# EAGLE board Untitled (EAGLE 7.1.0)
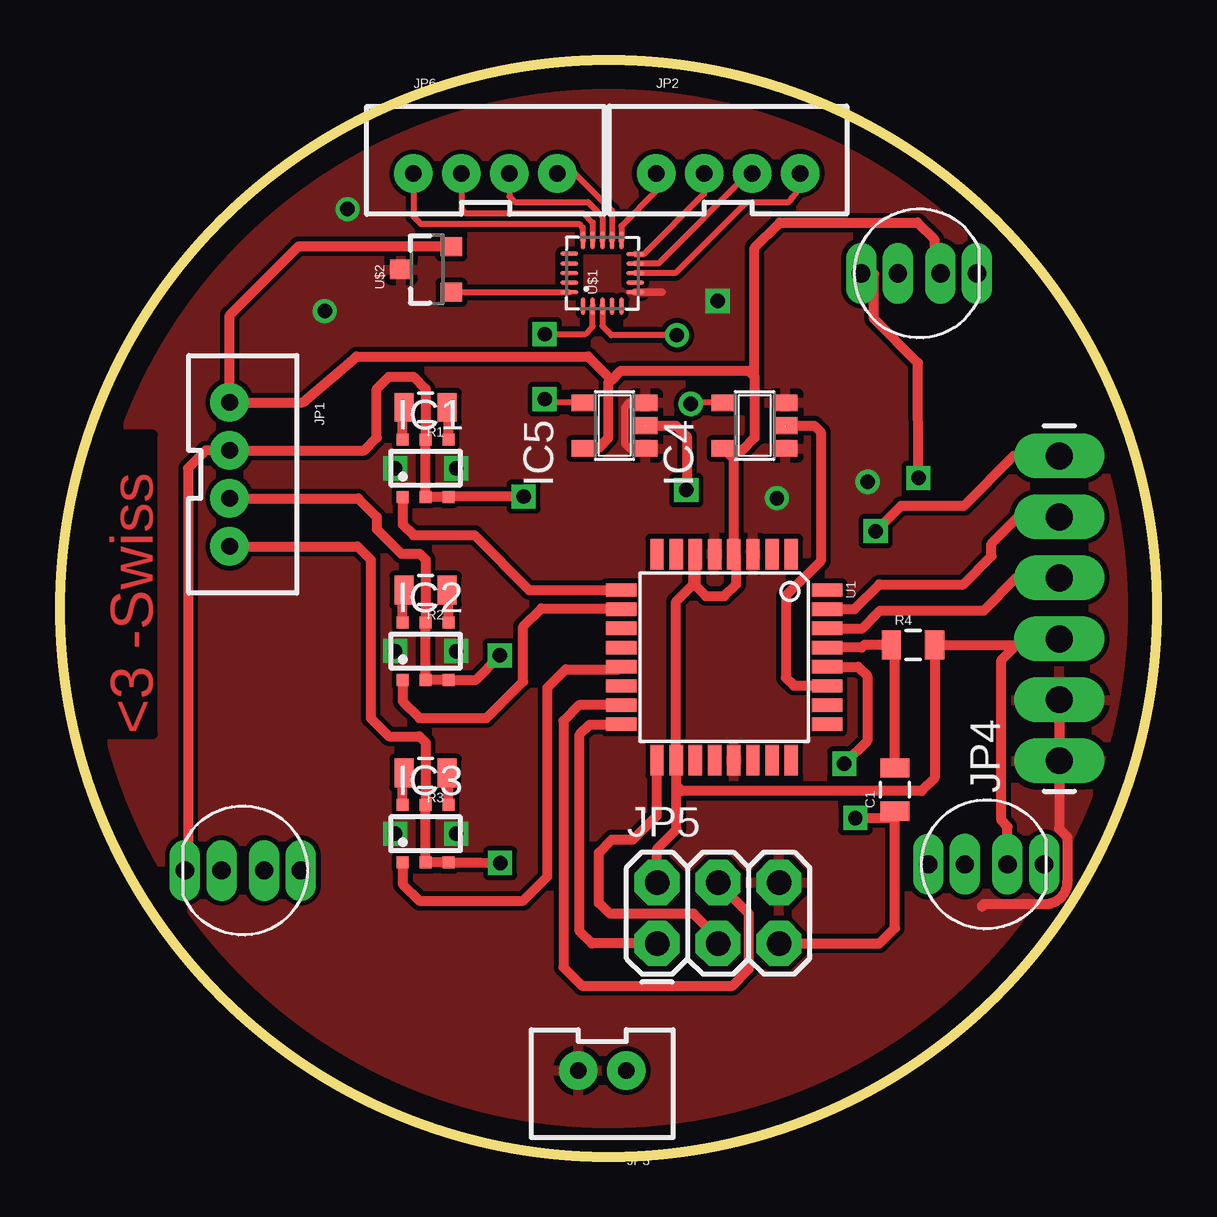
[diagram p0: board, top side]
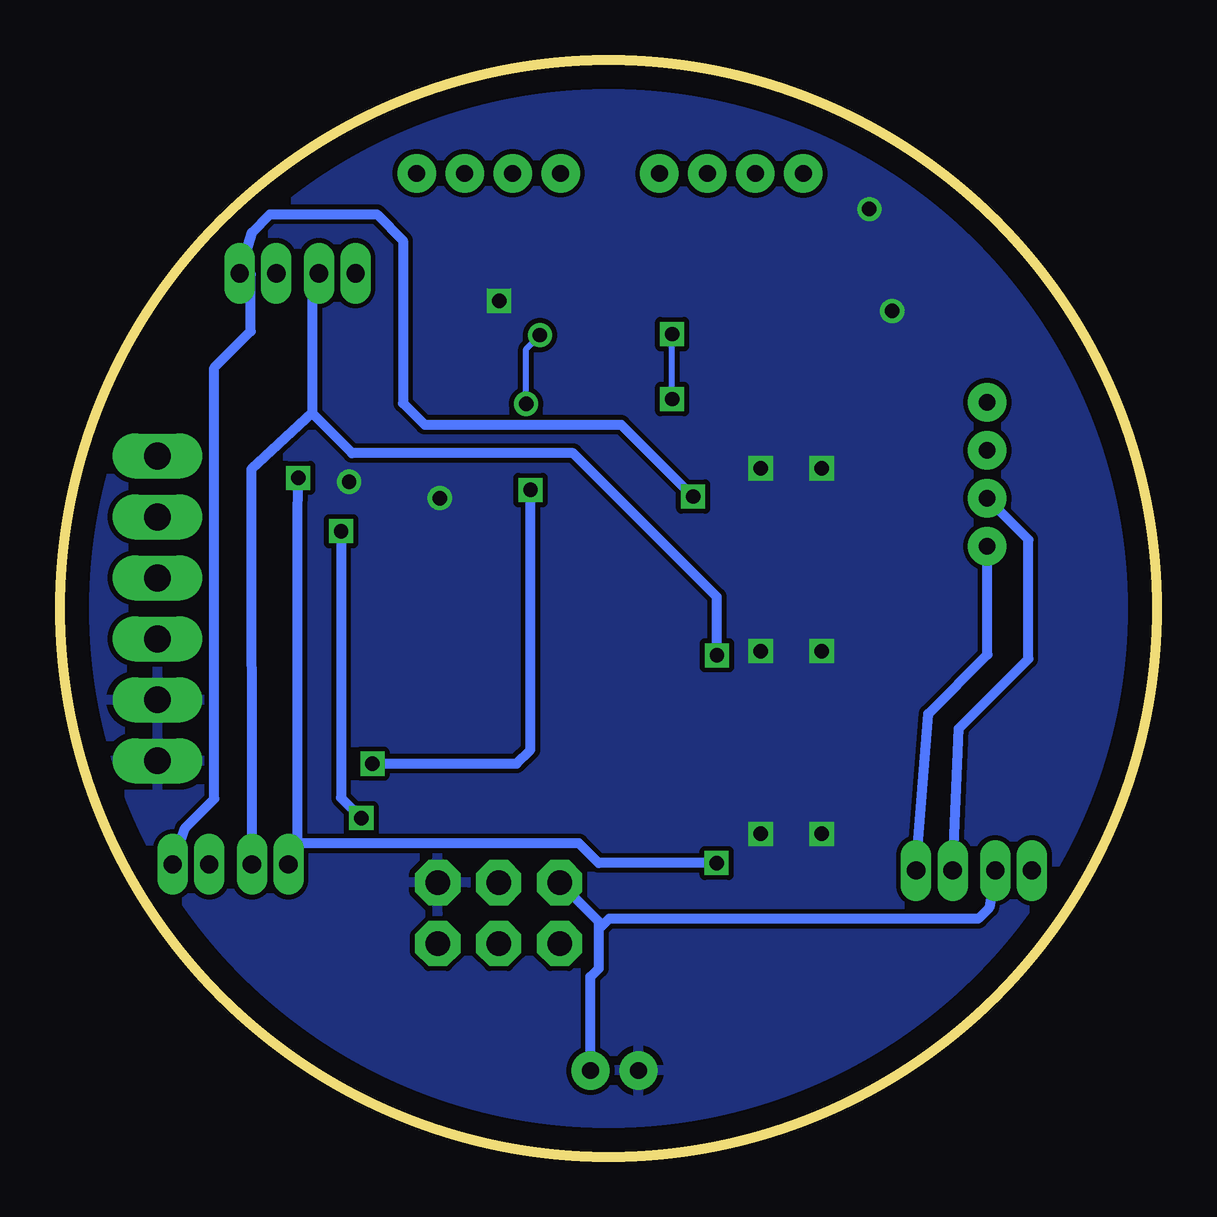
[diagram p1: board, bottom side, seen from below]

Size 45.72 x 45.72 mm. Coordinates in mm from the lower left corner, seen from the top.
Outline: circle at 22.86,22.86 radius 22.86
Copper layers (1*16): Top 0.035mm / dielectric 1.5mm / Bottom 0.035mm
Design rules "default": minimum track width 10mil, minimum drill 24mil, track to track 8mil, track to pad 8mil, pad to pad 8mil, via to via 8mil, smd to smd 8mil, copper to edge 40mil, drill to drill 8mil, minimum pad ring 10mil, minimum via ring 8mil, stop-mask expansion 4mil, vias tented up to drill 0mil, thermal gap 10mil

## Footprints (pad centres in the part's own frame; a part is rotated, then mirrored left to right if it is on the bottom)
0805 = smd 0.8 x 1.2: 1 -0.9,0; 2 0.9,0
LED-RGB-THRU = drill 0.762 pad 0.889 long: 1 2.413,0; 2 0.889,0; 3 -0.889,0; 4 -2.413,0
SC74_INFINEON = smd 0.5 x 0.5: 1 -0.95,-1.2; 2 0,-1.2; 3 0.95,-1.2; 4 0.95,1.2; 5 0,1.2; 6 -0.95,1.2
SOT23-5 = smd 0.69 x 0.99: 1 -0.95,-1.29; 2 0,-1.29; 3 0.95,-1.29; 4 0.95,1.3; 5 -0.95,1.3
JST-4-PTH-VERT = drill 0.7 pad 1.6: 1 -3,-0.55; 2 -1,-0.55; 3 1,-0.55; 4 3,-0.55
JST-2-PTH-VERT = drill 0.7 pad 1.6: 1 -1,-0.55; 2 1,-0.55
1X06_LONGPADS = drill 1.118 pad 1.88 long: 1 0,0; 2 2.54,0; 3 5.08,0; 4 7.62,0; 5 10.16,0; 6 12.7,0
2X3 = drill 1.016 pad 1.88 octagon: 1 0,0; 2 0,2.54; 3 2.54,0; 4 2.54,2.54; 5 5.08,0; 6 5.08,2.54
TQFP32-08 = smd 1.27 x 0.559: 1 -4.293,2.8; 2 -4.293,2; 3 -4.293,1.2; 4 -4.293,0.4; 5 -4.293,-0.4; 6 -4.293,-1.2; 7 -4.293,-2; 8 -4.293,-2.8; 17 4.293,-2.8; 18 4.293,-2; 19 4.293,-1.2; 20 4.293,-0.4; 21 4.293,0.4; 22 4.293,1.2; 23 4.293,2; 24 4.293,2.8 | smd 0.559 x 1.27: 9 -2.8,-4.293; 10 -2,-4.293; 11 -1.2,-4.293; 12 -0.4,-4.293; 13 0.4,-4.293; 14 1.2,-4.293; 15 2,-4.293; 16 2.8,-4.293; 25 2.8,4.293; 26 2,4.293; 27 1.2,4.293; 28 0.4,4.293; 29 -0.4,4.293; 30 -1.2,4.293; 31 -2,4.293; 32 -2.8,4.293
QFN-20-0.4MM-V2 = smd 0.75 x 0.195: 1 -1.367,0.8; 2 -1.367,0.4; 3 -1.367,0; 4 -1.367,-0.4; 5 -1.367,-0.8; 11 1.375,-0.8; 12 1.375,-0.4; 13 1.375,0; 14 1.375,0.4; 15 1.375,0.8 | smd 0.195 x 0.75: 6 -0.795,-1.372; 7 -0.395,-1.372; 8 0.005,-1.372; 9 0.405,-1.372; 10 0.805,-1.372; 16 0.81,1.372; 17 0.41,1.372; 18 0.01,1.372; 19 -0.39,1.372; 20 -0.79,1.372
SOT23-3 = smd 0.8 x 0.9: 1 -0.95,-1; 2 0.95,-1; 3 0,1.1

## Placement (x,y rotation side)
C1  [0805]  34.8,15.3 90 top
D1  LED-RGB-CA-THRUCLEAR  [LED-RGB-THRU]  7.62,11.94 180 top
D2  LED-RGB-CA-THRUCLEAR  [LED-RGB-THRU]  38.61,12.19 0 top
D3  LED-RGB-CA-THRUCLEAR  [LED-RGB-THRU]  35.81,36.83 0 top
IC1  ILD4001  [SC74_INFINEON]  15.24,28.7 0 top
IC2  ILD4001  [SC74_INFINEON]  15.24,21.08 0 top
IC3  ILD4001  [SC74_INFINEON]  15.24,13.46 0 top
IC4  74AHC1G125DBV  [SOT23-5]  28.96,30.48 90 top
IC5  74AHC1G125DBV  [SOT23-5]  23.11,30.48 90 top
JP1  [JST-4-PTH-VERT]  7.62,28.45 270 top
JP2  [JST-4-PTH-VERT]  27.85,41.54 0 top
JP3  M02JST-PTH-VERT  [JST-2-PTH-VERT]  22.61,3.05 180 top
JP4  [1X06_LONGPADS]  41.66,16.51 90 top
JP5  [2X3]  24.89,8.89 0 top
JP6  [JST-4-PTH-VERT]  17.73,41.54 0 top
R1  [0805]  15.24,31.24 180 top
R2  [0805]  15.24,23.62 180 top
R3  [0805]  15.24,16 180 top
R4  [0805]  35.56,21.34 0 top
U1  ATMEGA328P  [TQFP32-08]  27.69,20.83 270 top
U$1  MPR121V2  [QFN-20-0.4MM-V2]  22.61,36.83 90 top
U$2  LM3480IM4  [SOT23-3]  15.31,36.99 90 top

## Library data of the parts
C1 = SparkFun-Capacitors
D1-D3 = SparkFun-LED-fix; PROD_ID: DIO-10631
IC1-IC3 = infineon
IC4 IC5 = 74xx-little-us
JP1-JP4 JP6 = SparkFun-Connectors
JP5 = SparkFun-Connectors; PROD_ID: CONN-09701
R1-R4 = SparkFun-Resistors
U1 = SparkFun-DigitalIC; PROD_ID: IC-09069
U$1 = SparkFun-Sensors
U$2 = SparkFun-PowerIC

## Nets
3V: U$1.20 U$2.1
BOUT: D1.4 D2.4 D3.4 IC3.2 IC3.3 IC3.5 JP1.4
GND: IC4.1 IC4.3 IC5.1 IC5.3 JP3.2 JP4.1 JP4.2 JP5.6 U1.3 U1.5 U1.21 U$1.6 U$2.3
GOUT: D1.3 D2.3 D3.3 IC2.2 IC2.3 IC2.5 JP1.3
MISO: JP5.1 U1.16
MOSI: JP5.4 U1.15
N$1: JP2.1 U$1.11
N$2: JP2.2 U$1.10
N$3: JP2.3 U$1.9
N$4: JP2.4 U$1.8
N$5: C1.2 R4.1 U1.29
N$6: JP6.1 U$1.15
N$7: IC1.6 R1.2
N$8: IC1.4 R1.1
N$9: IC2.6 R2.2
N$10: IC2.4 R2.1
N$11: IC3.6 R3.2
N$12: IC3.4 R3.1
N$13: JP6.2 U$1.14
N$14: JP6.3 U$1.13
N$15: JP6.4 U$1.12
PWM0: IC1.1 U1.9
PWM1: IC2.1 U1.10
PWM2: IC3.1 U1.13
RESET: C1.1 JP4.6 JP5.5
ROUT: D1.1 D2.1 D3.1 IC1.2 IC1.3 IC1.5 JP1.2
RX: JP4.5 U1.31
SCK: JP5.3 U1.17
SCL: IC5.2 U1.28
SCLO: IC5.4 U$1.2
SDA: IC4.2 U1.27
SDAO: IC4.4 U$1.3
TX: JP4.4 U1.30
VCC: D1.2 D2.2 D3.2 IC4.5 IC5.5 JP1.1 JP3.1 JP4.3 JP5.2 R4.2 U1.4 U1.6 U1.18 U$2.2

## Tracks (layer width: path | path; a pad name or v marks a point on that pad's centre or on a via)
3V
  Top 0.254: U$2.1 U$1.20
BOUT  (via drill 0.6)
  Top 0.406: JP1.4 12.4,25.45 12.95,24.89 12.95,18.29 13.72,17.53 14.99,17.53 15.24,17.27 IC3.5 IC3.2 IC3.3 17.51,12.26 v18.35,12.25 | v35.79,28.3 35.77,33.09 33.93,34.93 33.93,36.81 D3.4
  Bottom 0.406: D1.4 9.53,18.46 7.06,20.93 7.06,25.44 JP1.4 | v18.35,12.25 23.26,12.25 24.09,13.07 35.82,13.07 | 35.82,13.07 D2.4 | 35.82,13.07 35.82,26.33 v35.79,28.3
GND  (via drill 0.6)
  Top 0.305: U$1.6 25.09,36.04 25.09,36.05 | IC5.3 23.73,31.43 23.55,31.25 23.55,29.72 23.73,29.53 IC5.1 | IC5.1
  Top 0.406: JP4.2 41.66,13.67 41.99,13.34 41.99,11.47 arc-90 41.04,10.53 38.53,10.53 arc90 38.43,10.43
  other vias: 13.97,28.7 16.51,28.7 13.97,21.08 16.51,21.08 13.97,13.46 16.51,13.46 11.98,39.51 27.41,35.68 11.04,35.26 33.67,28.14 29.89,27.45
  pour Top: -2.54,46.48 49.02,46.48 49.02,-2.54 -2.54,-2.54
  pour Bottom: -2.54,46.48 49.02,46.48 49.02,-2.54 -2.54,-2.54
GOUT  (via drill 0.6)
  Top 0.406: JP1.3 12.43,27.45 13.21,26.67 13.21,26.16 14.22,25.15 14.99,25.15 15.24,24.89 IC2.5 IC2.2 IC2.3 17.34,19.88 v18.34,20.9
  Bottom 0.406: D1.3 8.26,17.84 5.35,20.75 5.35,25.73 JP1.3 | v18.34,20.9 18.34,23.34 24.33,29.33 33.55,29.33 35.19,30.98 35.19,31.02 | 35.19,31.02 35.19,36.82 D3.3 | D2.3 37.73,28.66 35.19,31.02
MISO
  Top 0.406: JP5.1 22.17,8.89 21.66,9.4 21.66,17.59 22.08,18.02 U1.16
MOSI
  Top 0.406: U1.15 21.64,18.83 20.98,18.17 20.98,7.9 21.76,7.13 28.03,7.13 28.72,7.83 28.72,10.13 JP5.4
N$1
  Top 0.254: JP2.1 24.85,40.25 23.4,38.8 U$1.11
N$2
  Top 0.254: U$1.10 24.35,37.64 26.85,40.14 JP2.2
N$3
  Top 0.254: JP2.3 28.7,40.99 24.94,37.23 U$1.9
N$4
  Top 0.254: JP2.4 30.85,40.33 30.55,40.03 30.55,40.02 30.48,39.94 30.48,39.91 30.35,39.78 28.61,39.78 28.46,39.63 28.44,39.63 25.66,36.84 U$1.8
N$5
  Top 0.406: C1.2 34.8,21.2 R4.1 33.53,21.34 33.42,21.22 U1.29
N$6
  Top 0.254: JP6.1 14.73,39.2 15.03,38.89 21.63,38.89 21.78,38.74 21.78,38.23 U$1.15
N$7
  Top 0.406: IC1.6 14.29,31.19 R1.2
N$8
  Top 0.406: IC1.4 16.19,31.19 R1.1
N$9
  Top 0.406: IC2.6 14.29,23.57 R2.2
N$10
  Top 0.406: IC2.4 16.19,23.57 R2.1
N$11
  Top 0.406: IC3.6 14.29,15.95 R3.2
N$12
  Top 0.406: IC3.4 16.19,15.95 R3.1
N$13
  Top 0.254: JP6.2 16.73,39.51 16.91,39.33 21.82,39.33 22.2,38.94 U$1.14
N$14
  Top 0.254: JP6.3 18.73,40.03 18.97,39.8 22,39.8 22.61,39.19 U$1.13
N$15
  Top 0.254: JP6.4 21.46,40.99 23.01,39.44 U$1.12
PWM0
  Top 0.406: IC1.1 14.29,26.35 14.73,25.91 17.27,25.91 19.56,23.62 U1.9
PWM1
  Top 0.406: IC2.1 14.29,18.98 14.99,18.29 17.78,18.29 19.3,19.81 19.3,22.1 20.07,22.86 23.36,22.86 U1.10
PWM2
  Top 0.406: IC3.1 14.29,11.36 14.99,10.67 19.3,10.67 20.32,11.68 20.32,19.56 21.08,20.32 23.29,20.32 U1.13
RESET  (via drill 0.6)
  Top 0.406: JP5.5 34.15,8.89 34.8,9.54 C1.1 34.51,14.12 v33.16,14.12 | JP4.6 39.75,29.21 37.67,27.13 35.06,27.13 v34,26.08
  Bottom 0.406: v34,26.08 34,14.97 v33.16,14.12
ROUT  (via drill 0.6)
  Top 0.406: D1.1 5.33,12.32 5.33,28.7 6.08,29.45 JP1.2 12.68,29.45 13.21,29.97 13.21,32 13.72,32.51 14.73,32.51 15.24,32 IC1.5 IC1.2 IC1.3 16.21,27.52 v19.33,27.52
  Bottom 0.406: D2.1 40.51,13.69 39.28,14.92 39.28,32.89 37.77,34.41 37.77,36.78 D3.1 37.72,38.53 36.97,39.28 32.51,39.28 31.42,38.2 31.42,31.42 30.52,30.52 22.33,30.52 v19.33,27.52
RX
  Top 0.406: U1.31 33.12,22.83 34.15,23.87 37.65,23.87 38.83,25.04 38.83,25.56 39.95,26.69 41.64,26.69 JP4.5
SCK
  Top 0.406: JP5.3 27.43,9.08 26.41,10.13 22.93,10.13 22.46,10.58 22.46,12.68 23.01,13.23 23.88,13.23 24.88,14.22 U1.17
SCL  (via drill 0.6)
  Top 0.406: IC5.2 25.68,30.48 26.13,30.03 26.13,28.03 | 26.13,28.03 26.13,27.82 v26.11,27.8 26.11,28 26.13,28.03 | U1.28 33.27,20.43 33.65,20.05 33.65,17.34 v32.69,16.39
  Bottom 0.406: v32.69,16.39 26.68,16.39 26.11,16.96 v26.11,27.8
SCLO  (via drill 0.6)
  Top 0.254: IC5.4 20.36,31.43 v20.2,31.58 | v20.2,34.29 21.91,34.29 22.21,34.61 U$1.2
  Bottom 0.254: v20.2,31.58 v20.2,34.29
SDA
  Top 0.406: IC4.2 31.44,30.48 31.71,30.22 31.71,24.84 30.26,23.39 30.26,19.97 30.59,19.64 31.97,19.64 U1.27
SDAO  (via drill 0.6)
  Top 0.254: U$1.3 22.61,34.63 22.99,34.25 v25.71,34.25 | IC4.4 26.33,31.43 v26.29,31.39
  Bottom 0.254: v26.29,31.39 26.29,33.67 v25.71,34.25
TX
  Top 0.406: U1.30 33.44,22.03 34.18,22.77 38.5,22.77 39.88,24.14 41.65,24.14 JP4.4
VCC
  Top 0.254: JP1.1
  Top 0.406: IC5.5 22.42,29.53 22.86,29.97 22.86,32.26 22.99,32.39 | 22.99,32.39 23.37,32.77 28.7,32.77 28.96,32.51 | 28.96,32.51 28.96,29.97 28.45,29.46 27.72,29.46 IC4.5 28.09,29.1 U1.4 28.19,25.01 28.19,23.88 27.69,23.37 26.92,23.37 26.49,23.81 U1.6 26.42,25.05 26.42,23.88 25.69,23.15 U1.18 25.71,16.51 25.71,15.48 | JP1.1 10.11,31.45 12.36,33.36 22.02,33.36 22.99,32.39 | JP5.2 24.89,12.83 25.71,13.65 25.71,15.48 | 39.88,21.34 R4.2 36.46,15.8 35.91,15.25 25.93,15.25 25.71,15.48 | 39.88,21.34 41.4,21.34 JP4.3 | D2.2 39.5,13.76 39.24,14.02 39.24,20.7 39.88,21.34 | JP1.1 7.07,35.07 9.95,37.95 16.3,37.95 U$2.2 | 28.96,32.51 28.96,37.89 30,38.94 35.75,38.94 36.44,38.24 36.44,36.84 D3.2
  Bottom 0.406: JP3.1 23.61,7.51 23.26,7.85 23.26,9.5 | 23.26,9.5 23.26,9.8 JP5.2 | D1.2 6.98,10.38 7.44,9.93 22.83,9.93 23.26,9.5

## Text on the board
Top: <3 -Swiss